# Altium PCB Smart Stepper Fin R1.0.PcbDoc
Units mil, origin at the board's own origin, x right, y up, seen from the top; angles counter-clockwise.
Board outline 2280 x 1255 mil, 2 copper layers (Top Layer, Bottom Layer); 30 components, 42 nets, 186 pads, 90 vias.
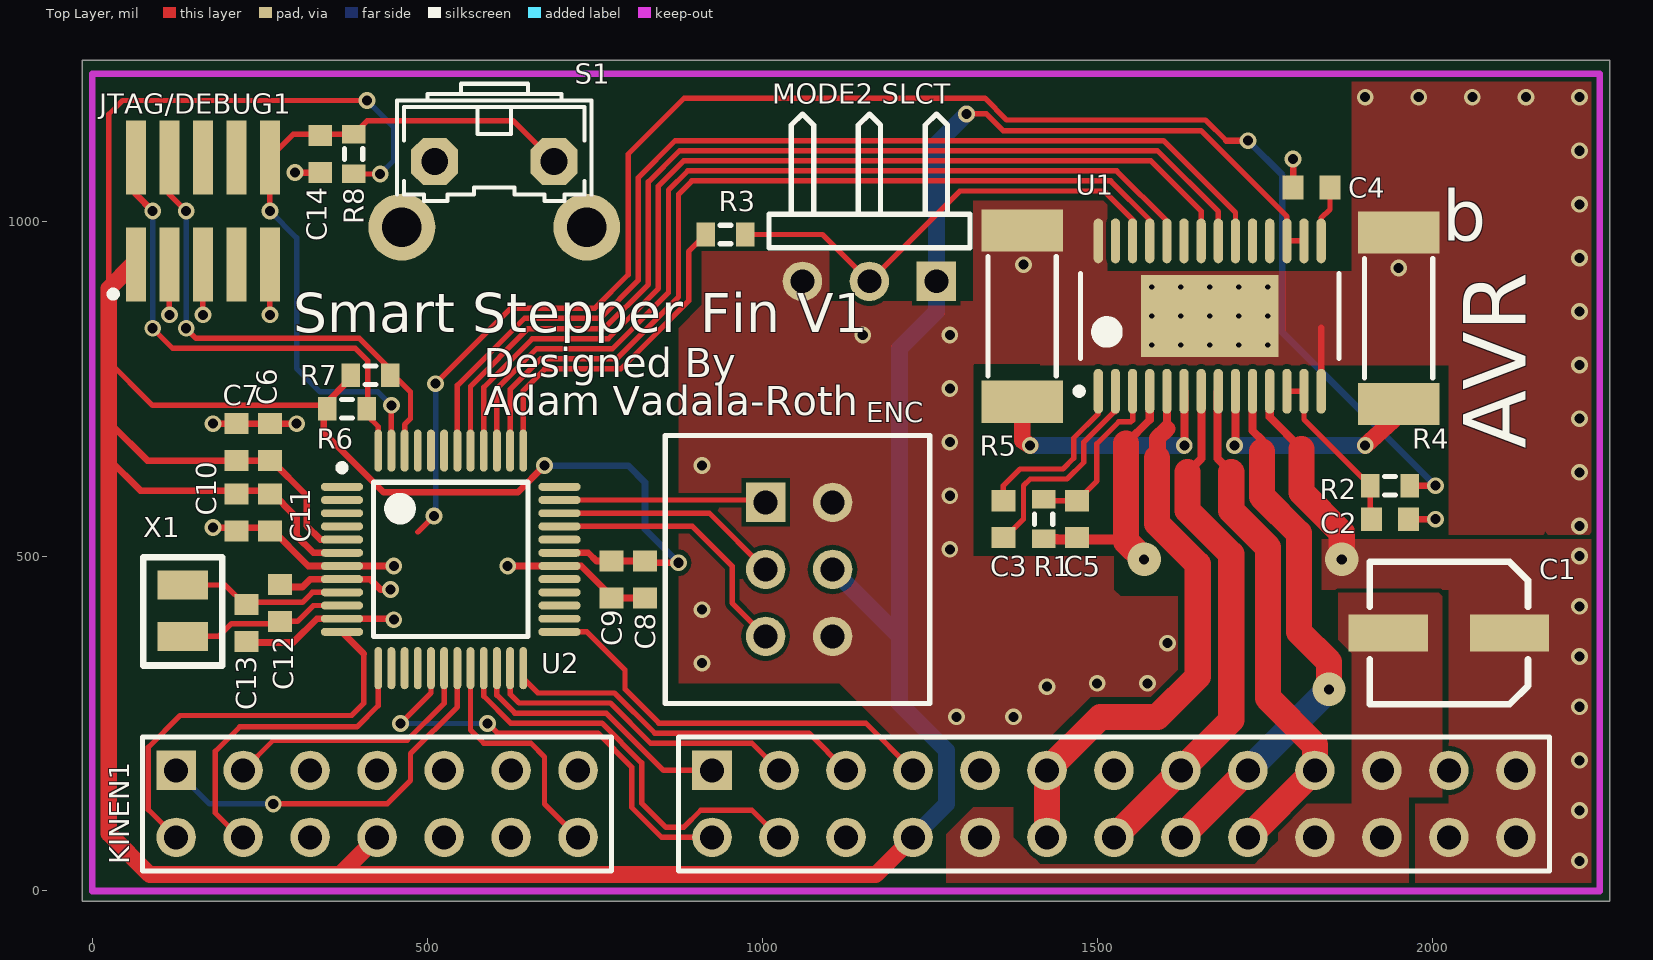
[diagram p0: Top Layer view]
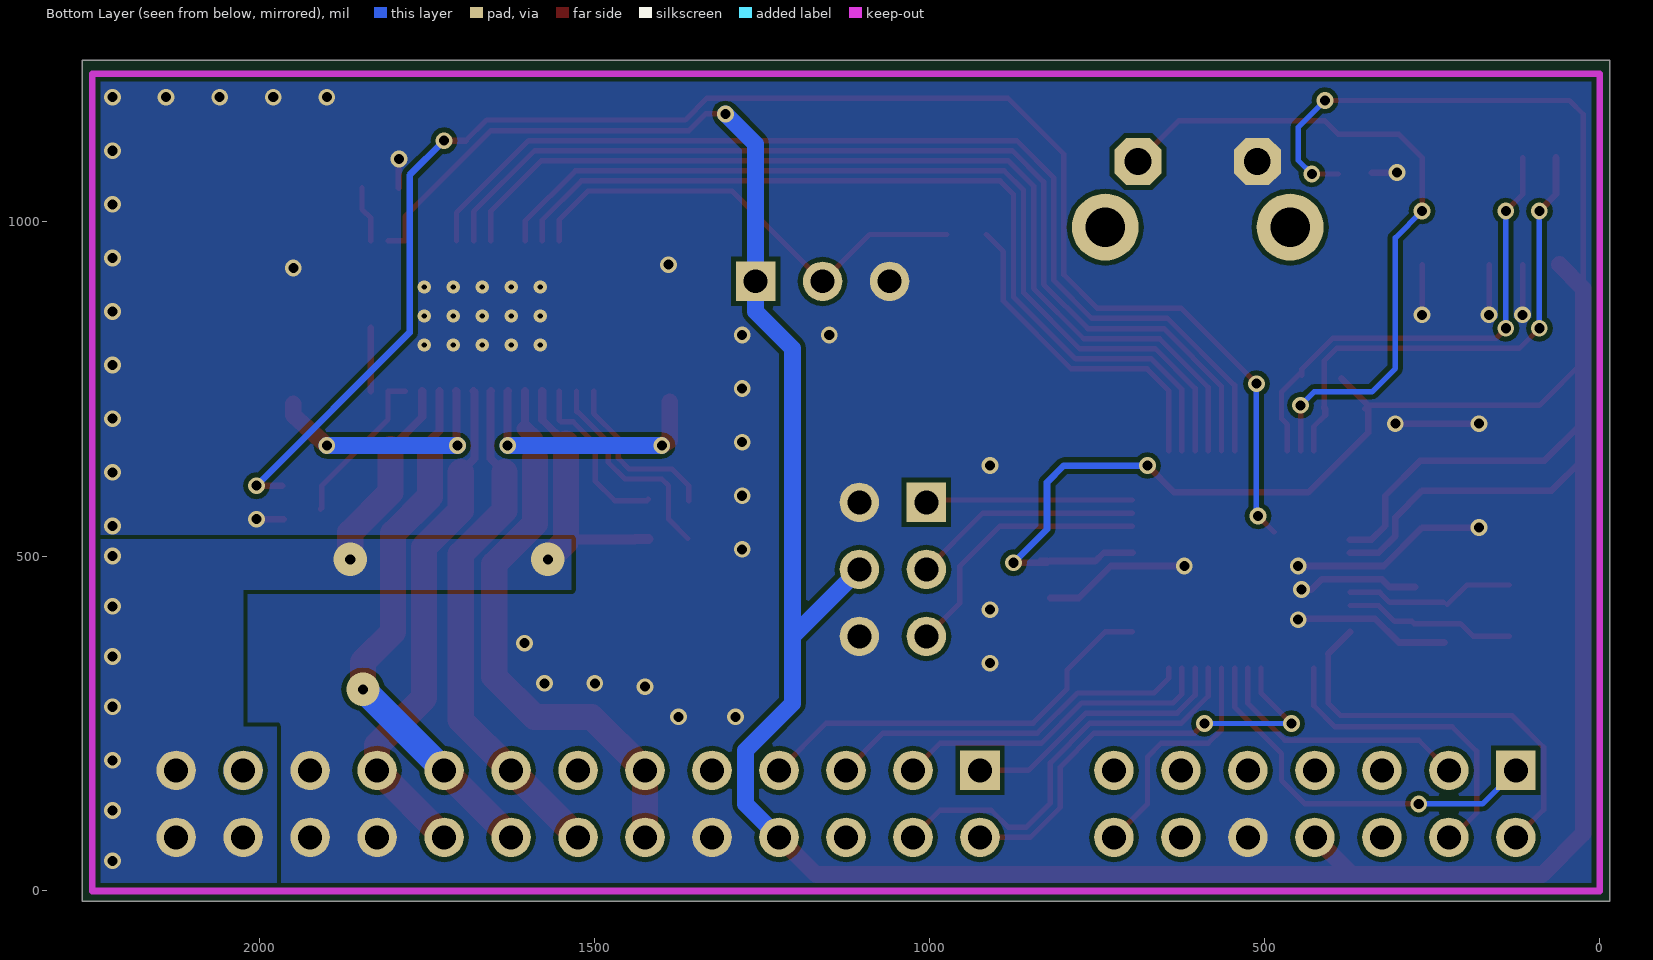
[diagram p1: Bottom Layer view, seen from below]

## Layer stack, top to bottom
Top Solder: solder mask 0.4, Solder Resist, Dk 3.5
Top Layer: signal copper 1.4
Dielectric 1: dielectric 12.6, FR-4, Dk 4.8
Bottom Layer: signal copper 1.4
Bottom Solder: solder mask 0.4, Solder Resist, Dk 3.5

## Board outline
-15,-15 2265,-15 2265,1240 -15,1240

## Design rules (kind name [scope] priority, off if disabled: settings)
Clearance [All] p1: gap=7
PlaneConnect [All] p1: planeconnectstyle=Direct reliefexpansion=20 reliefentries=4 reliefconductorwidth=10 reliefairgap=10
PolygonConnect [All] p1: connectstyle=Direct reliefconductorwidth=10 reliefentries=4 polygonreliefangle="90 Angle" airgapwidth=10
RoutingVias [All] p1: holewidth=15 width=25 viastyle="Through Hole" minholewidth=15 minwidth=25 maxholewidth=28 maxwidth=50
SolderMaskExpansion [All] p1: expansion=4
UnpouredPolygon [All] p1: allowunpoured=FALSE
Width [All] p1: maxlimit=50 minlimit=7 preferedwidth=8
28 further rules are at their usual default settings.

## Classes and differential pairs
component class "U_Smart Stepper Fin - Driver - DRV8825": C1 C2 C3 C4 C5 "MODE2 SLCT" R1 R2 R3 R4 R5 U1
component class "U_Smart Stepper Fin - Kinen Connector": KINEN1
component class "U_Smart Stepper Fin - MCU MKL05Z32VLF4 TQFP48": C6 C7 C8 C9 C10 C11 C12 C13 C14 ENC JTAG/DEBUG1 R6 R7 R8 S1 U2 X1

## Components (designator, comment, footprint, x,y, rotation, side; value= is the part's Value field where it differs from the comment)
C1 "VS C" "Panasonic VS C" 1905,270 r0 top
C2 "0603" 1608[0603] 1937,555 r180 top
C3 "0603" 1608[0603] 1360,555 r270 top
C4 "0603" 1608[0603] 1820,1050 r0 top
C5 "0603" 1608[0603] 1470,555 r90 top
C6 "0603" 1608[0603] 265,670 r270 top
C7 "0603" 1608[0603] 215,670 r270 top
C8 "0603" 1608[0603] 825,465 r90 top
C9 "0603" 1608[0603] 775,465 r90 top
C10 "0603" 1608[0603] 215,565 r270 top
C11 "0603" 1608[0603] 265,565 r270 top
C12 "0603" 1608[0603] 280,430 r90 top
C13 "0603" 1608[0603] 230,400 r270 top
C14 "Cap Semi" 1608[0603] 340,1099.92 r90 top
ENC "Header 3X2" "HDR2X3 Shrouded - Molex 0901301106" 1005,580 r270 top (schematic designator P?)
JTAG/DEBUG1 "ARM Cortex JTAG-DEBUG" FTSH-105-XX-X-DV 165,1015 r180 top
KINEN1 "Kinen Device NEW" "Kinen Port - Device" 725,80 r90 top locked
"MODE2 SLCT" "Header 3H" HDR1X3H 1260,910 r180 top
R1 "0805" J1-0603 1420,555 r90 top
R2 "0603" J1-0603 1937,605 r0 top
R3 "0603" J1-0603 945,980 r180 top
R4 "2512" Resistor2512 1950,855 r270 top
R5 "2512" Resistor2512 1387.98,858.2 r270 top
R6 "0603" J1-0603 380,720 r0 top
R7 "0603" J1-0603 415,770 r0 top
R8 "Res3" J1-0603 390,1099.92 r270 top
S1 "1571610-2" B3F-31XX 600,1040 r180 top
U1 "DRV8825" DRV8825 1667.98,858.2 r90 top
U2 "MKL05Z32VLF4" MKL05Z32VLF4 535,495 r0 top
X1 "ABS07-32.768KHZ-T" ABS07-32.768KHZ-T 135,380 r90 top

## Footprints (in the part's own frame and the unit in brackets; to place one, negate y for a bottom-side part, rotate by r counter-clockwise, add the part's x,y. Pads: shape width x height; smd on the part's side, far side on the other; paste and mask are expansions set on the pad)
1608[0603] [mm] "Chip Capacitor, Body 1.6x0.8mm, IPC High Density"
  rect 0.8x0.9 smd: 1(-0.7,0) 2(0.7,0)
  body extent -0.87,-0.48 0.87,0.48, height 1.3
ABS07-32.768KHZ-T [mm] "ABS07-32.768KHZ-T Crystal Oscillator"
  rect 1.1x1.9 smd: 1(0,0) 2(1.95,0)
  silkscreen extent -1.1,-1.5 3,1.5
B3F-31XX [mil]
  oct 70x70 hole 40: 1(-89,-49) 2(89,-49)
  round 100 hole 59: 3(-138,49) 4(138,49)
  silkscreen extent -145,-165 145,10, body extent -165,-200 165,109, height 303
DRV8825 [mm] "TSOP, 28-Leads, Body 9.70x4.40mm, Pitch 0.65mm, Thermal Pad 5.22.2x3.10.2mm, IPC Medium Density"
  oval 1.7x0.35 smd: 1(-2.85,4.225) 2(-2.85,3.575) 3(-2.85,2.925) 4(-2.85,2.275) 5(-2.85,1.625) 6(-2.85,0.975) 7(-2.85,0.325) 8(-2.85,-0.325) 9(-2.85,-0.975) 10(-2.85,-1.625) 11(-2.85,-2.275) 12(-2.85,-2.925) 13(-2.85,-3.575) 14(-2.85,-4.225) 15(2.85,-4.225) 16(2.85,-3.575) 17(2.85,-2.925) 18(2.85,-2.275) 19(2.85,-1.625) 20(2.85,-0.975) 21(2.85,-0.325) 22(2.85,0.325) 23(2.85,0.975) 24(2.85,1.625) 25(2.85,2.275) 26(2.85,2.925) 27(2.85,3.575) 28(2.85,4.225)
  rect 3.1x5.22 smd: 29(0,0)
  silkscreen extent -2.97,-4.9 1.6,5.07, body extent -2.25,-4.9 2.25,4.9, height 1.2
FTSH-105-XX-X-DV [mm] "1.27mm pitch, 10 pin, terminal strip; vertical, SMT"
  rect 0.75x2.8 smd mask+0: 1(2.54,2.03) 2(2.54,-2.03) 3(1.27,2.03) 4(1.27,-2.03) 5(0,2.03) 6(0,-2.03) 7(-1.27,2.03) 8(-1.27,-2.03) 9(-2.54,2.03) 10(-2.54,-2.03)
  silkscreen extent 3.27,3.03 3.52,3.27
HDR1X3H [mm] "Connector; Header; 3 Position; Right Angle"
  rect 1.5x1.5 hole 0.9: 1(0,0)
  round 1.5 hole 0.9: 2(2.54,0) 3(5.08,0)
  silkscreen extent -1.27,-6.35 6.35,-1.27
"HDR2X3 Shrouded - Molex 0901301106" [mm] "Connector; Header; 3x2 Position Molex 0901301106"
  rect 1.5x1.5 hole 0.9: 1(0,0)
  round 1.5 hole 0.9: 2(0,2.54) 3(2.54,0) 4(2.54,2.54) 5(5.08,0) 6(5.08,2.54)
  silkscreen extent -2.54,-3.81 7.62,6.22, body extent -2.44,-3.65 7.52,6.1, height 8.35
J1-0603 [mm] "Chip Resistor, Body 1.6x0.8mm, IPC High Density"
  rect 0.7x0.9 smd: 1(-0.75,0) 2(0.75,0)
  silkscreen extent -0.2,-0.35 0.2,0.35, body extent -0.85,-0.48 0.85,0.48, height 0.9
"Kinen Port - Device" [mm] "Synthetos Kinen Expansion Port Socket"
  rect 1.5x1.5 hole 0.9: 1(2.54,15.24) 15(2.54,-5.08)
  round 1.5 hole 0.9: 2(0,15.24) 3(2.54,12.7) 4(0,12.7) 5(2.54,10.16) 6(0,10.16) 7(2.54,7.62) 8(0,7.62) 9(2.54,5.08) 10(0,5.08) 11(2.54,2.54) 12(0,2.54) 13(2.54,0) 14(0,0) 16(0,-5.08) 17(2.54,-7.62) 18(0,-7.62) 19(2.54,-10.16) 20(0,-10.16) 21(2.54,-12.7) 22(0,-12.7) 23(2.54,-15.24) 24(0,-15.24) 25(2.54,-17.78) 26(0,-17.78) 27(2.54,-20.32) 28(0,-20.32) 29(2.54,-22.86) 30(0,-22.86) 31(2.54,-25.4) 32(0,-25.4) 33(2.54,-27.94) 34(0,-27.94) 35(2.54,-30.48) 36(0,-30.48) 37(2.54,-33.02) 38(0,-33.02) 39(2.54,-35.56) 40(0,-35.56)
  silkscreen extent -1.27,-36.83 3.81,16.51
MKL05Z32VLF4 [mm] "TSQFP, 48-Leads, Body 7.00x7.00mm, Pitch 0.50mm, IPC Medium Density"
  oval 1.6x0.3 smd: 1(-4.125,2.75) 2(-4.125,2.25) 3(-4.125,1.75) 4(-4.125,1.25) 5(-4.125,0.75) 6(-4.125,0.25) 7(-4.125,-0.25) 8(-4.125,-0.75) 9(-4.125,-1.25) 10(-4.125,-1.75) 11(-4.125,-2.25) 12(-4.125,-2.75) 25(4.125,-2.75) 26(4.125,-2.25) 27(4.125,-1.75) 28(4.125,-1.25) 29(4.125,-0.75) 30(4.125,-0.25) 31(4.125,0.25) 32(4.125,0.75) 33(4.125,1.25) 34(4.125,1.75) 35(4.125,2.25) 36(4.125,2.75)
  oval 0.3x1.6 smd: 13(-2.75,-4.125) 14(-2.25,-4.125) 15(-1.75,-4.125) 16(-1.25,-4.125) 17(-0.75,-4.125) 18(-0.25,-4.125) 19(0.25,-4.125) 20(0.75,-4.125) 21(1.25,-4.125) 22(1.75,-4.125) 23(2.25,-4.125) 24(2.75,-4.125) 37(2.75,4.125) 38(2.25,4.125) 39(1.75,4.125) 40(1.25,4.125) 41(0.75,4.125) 42(0.25,4.125) 43(-0.25,4.125) 44(-0.75,4.125) 45(-1.25,4.125) 46(-1.75,4.125) 47(-2.25,4.125) 48(-2.75,4.125)
  silkscreen extent -4.25,-2.93 2.93,3.6, body extent -3.5,-3.5 3.5,3.5, height 1.6
"Panasonic VS C" [mm]
  rect 3x1.4 smd: 1(5.348,2.921) 2(0.748,2.921)
  silkscreen extent 0.05,0.22 6.05,5.62, body extent 0.1,0.29 6,5.59, height 5.41
Resistor2512 [mm]
  rect 1.6x3.1 smd: 1(-3.25,0) 2(3.25,0)
  silkscreen extent -2.26,-1.3 2.26,1.3, body extent -3.24,-1.4 3.24,1.4, height 0.9

## Part data
C1: library part "Cap Pol1", "Polarized Capacitor (Radial)"
C2 C3 C4 C5 C6 C7 C8 C9 C10 C11 C12 C13: library part "Cap Semi", "Capacitor (Semiconductor SIM Model)"
C14: "Capacitor (Semiconductor SIM Model)"
ENC: "Header, 3-Pin, Dual row"
JTAG/DEBUG1: library part "ARM Cortex JTAG-DEBUG Header"
"MODE2 SLCT": "Header, 3-Pin, Right Angle"
R1 R2 R3 R4 R5 R6 R7: library part Res3, "Resistor"
R8: "Resistor"
S1: library part 1571610-2_1, "SWTCH Momentary Washable"
U1: "DRV8825 Ti Stepper Driver"
U2: "ARM Cortex M0+"
X1: "ABS07-32.768KHZ-T RTC Crystal Oscillator"

## Via types
v1: diameter 25, hole 15, Top Layer to Bottom Layer, 72 vias
v2: diameter 19.68, hole 7.87, Top Layer to Bottom Layer, 15 vias
v3: diameter 50, hole 15, Top Layer to Bottom Layer, 3 vias

## Nets (pads, with @x,y where several pads share a name; then routed paths per layer and width w, separated by ;. In a path a pad name is that pad's centre, name@x,y a point inside that pad or via, vN(x,y) a via of type N, cw(c..) or ccw(c..) an arc to the next point about the centre after c; other vN are vias at no path point)
3.3VCC: "MODE2 SLCT.1" C6.2 C7.2 C8.2 C9.2 C10.1 C11.1 ENC.4 JTAG/DEBUG1.1 KINEN1.8 KINEN1.22 R6.1 R7.1 R8.2 U1.16 U1.17 U2.5 U2.6 U2.31 | length 7145.5
  Top Layer w8: 16,685 24.5,693.5 27.75,696.75 ; 20,795 90,725 345.47,725 R6.1 ; 24.5,899.5 24.5,1159.5 45,1180 v1(410,1180) ; R8.2 v1(429.61,1070.39) ; v1(1305,1160) 1334.5,1160 1359.5,1135 1655,1135 1783.13,1006.87 U1.17 U1.16
  Top Layer w10: 24.5,645 71.94,597.56 265,597.56 305,557.56 305,530 330.16,504.84 U2.6 ; 27.75,696.75 82.06,642.44 267.56,642.44 320,590 320,545 340.47,524.53 U2.5 ; R6.1@345.47,720 345.47,684.53 435,595 635,595 v1(675,635) ; R6.1@345.47,725 R7.1@385.47,765 ; U2.31 740.16,504.84 752.44,492.56 C8.2@820,492.56 ; C8.2@835,492.56 C8.2 825,490 v1(875,490)
  Top Layer w25: JTAG/DEBUG1.1@60.08,935.08 24.5,899.5 24.5,693.5 24.5,645 24.5,85.5 85.5,24.5 369.5,24.5 ; KINEN1.8 369.5,24.5 ; KINEN1.22 1169.5,24.5 369.5,24.5
  Bottom Layer w8: v1(410,1180) 450,1140 450,1090.78 v1(429.61,1070.39)
  Bottom Layer w10: v1(675,635) 800,635 825,610 825,540 v1(875,490)
  Bottom Layer w25: ENC.4 1205,380 ; KINEN1.22 1275,130 1275,210 1205,280 1205,380 ; v1(1305,1160) 1260,1115 1260,910 1260,865 1205,810 1205,380
24VCC: C1.1 C5.1 KINEN1.38 KINEN1.39 KINEN1.40 R1.1 U1.4 U1.11 | length 692.6
  Top Layer w12: 1543,668 1578.41,703.41 U1.4 ; U1.11 1757.54,707.46 1805,660
  Top Layer w15: R1.1 1440,525.47 1440.47,525 1540,525
  Top Layer w39: 1543,668 1543,522 v3(1570,495) ; 1805,660 1805,595 1865,535 v3(1865,495)
  other v1: 2220,45 2220,120 2220,195 2220,275 2220,350 2220,425 2220,500
A: ENC.3 U2.34 | length 342.4
  Top Layer w8: U2.34 921.1,563.9 ENC.3
AOUT1: KINEN1.25 KINEN1.26 U1.5 | length 837.5
  Top Layer w12: 1604,690 U1.5
  Top Layer w25: 1584,651 1590,657 1590,676 1604,690
  Top Layer w39: KINEN1.26 KINEN1.25 1505,260 1590,260 1650,320 1650,487.83 1589,548.83 1589,646
AOUT2: KINEN1.28 KINEN1.29 U1.7 | length 774
  Top Layer w12: 1635,625 1655.5,645.5 1655.5,745.68 U1.7
  Top Layer w39: KINEN1.28 KINEN1.29 1700,255 1700,502.89 1635,567.89 1635,625
B: ENC.5 U2.33 | length 407.8
  Top Layer w8: U2.33 895.79,544.21 955,485 955,430 ENC.5
BOUT1: KINEN1.30 KINEN1.31 U1.10 | length 804.8
  Top Layer w12: U1.10 1731.95,687.05 1746,673 1746,656
  Top Layer w39: KINEN1.30 KINEN1.31 ; 1746,656 1746,588.95 1801,533.95 1801,387 1846,342 v3(1846,301)
  Bottom Layer w39: KINEN1.31 v3(1846,301)
BOUT2: KINEN1.32 KINEN1.33 U1.8 | length 768.2
  Top Layer w12: U1.8 1679.5,744.73 1679.5,645.5 1700,625
  Top Layer w39: 1700,625 1700,567.94 1755,512.94 1755,288 1825,218 KINEN1.33 KINEN1.32
EXTAL0: C13.1 U2.9 X1.2 | length 250.1
  Top Layer w8: X1.2 198.23,456.77 C13.1@227.44,427.56 ; C13.1@233.25,430.81 313.44,430.81 328.41,445.79 U2.9
GND: "MODE2 SLCT.3" C1.2 C2.1 C4.1 C6.1 C7.1 C8.1 C9.1 C10.2 C11.2 C12.2 C13.2 C14.1 ENC.2 ENC.6 JTAG/DEBUG1.3 JTAG/DEBUG1.5 JTAG/DEBUG1.9 KINEN1.10 KINEN1.24 KINEN1.34 KINEN1.35 KINEN1.36 KINEN1.37 R4.1 R5.1 S1.2 U1.14 U1.28 U1.29 U2.7 U2.8 U2.11 U2.30 | length 1496.2
  Top Layer w8: v1(115,860) JTAG/DEBUG1.3 ; v1(165,860) JTAG/DEBUG1.5 ; v1(265,860) JTAG/DEBUG1.9
  Top Layer w10: v1(180,542.44) 265,542.44 322.28,485.16 U2.7 v1@449.84,485.16 ; v1(180,697.56) C7.1 C6.1 v1(305,697.56) ; C13.2@231.65,370.8 299.64,370.8 335.26,406.42 U2.11 v1@448.58,406.42 ; C12.2@275.29,453.66 313.66,453.66 325.47,465.47 U2.8 414.53,465.47 430,450 v1@450,450 ; v1(302.64,1072.36) C14.1 ; v1@620.16,485.16 U2.30 729.84,485.16 777.56,437.44 C8.1@820,437.44 ; C4.1 v1(1792.44,1092.56) ; U1.14 1834.31,840.68 ; C2.1 v1(2005,555)
  other v1: 1290,260 1375,260 1425,305 1500,310 1575,310 910,340 1605,370 450,405 910,420 445,450 450,485 620,485 1280,510 2220,545 1280,590 2220,625 910,635 1280,670 2220,705 1280,750 2220,785 1150,830 1280,830 2220,865 1950,930 1390,935 2220,945 2220,1025 2220,1105 1900,1185 1980,1185 2060,1185 2140,1185 2220,1185
  other v2: 1581.36,814.9 1624.67,814.9 1667.98,814.9 1711.28,814.9 1754.59,814.9 1581.36,858.2 1624.67,858.2 1667.98,858.2 1711.28,858.2 1754.59,858.2 1581.36,901.51 1624.67,901.51 1667.98,901.51 1711.28,901.51 1754.59,901.51
INDEX: ENC.1 U2.35 | length 309.1
  Top Layer w8: U2.35 1001.42,583.58 ENC.1
KSPI_MISO: KINEN1.4 U2.13 | length 485.1
  Top Layer w8: KINEN1.4@230,70 183.47,116.53 183.47,208.47 220,245 395,245 426.73,276.73 U2.13
KSPI_MOSI: KINEN1.2 U2.12 | length 620.5
  Top Layer w8: KINEN1.2 83.47,121.53 83.47,214.5 130.97,262 387,262 405,280 405,354.33
  Top Layer w10: U2.12 405,354.33
NetC2_2: C2.2 R2.1 U1.12 U1.13 | length 243.3
  Top Layer w8: U1.12 U1.13 1808.72,703.75 R2.1 1907.47,571.97 C2.2@1909.44,570
NetC3_1: C3.1 U1.1 | length 259.5
  Top Layer w8: C3.1 1360,605 1385,630 1448.79,630 1465,646.21 1465,676.21 1501.64,712.85 U1.1
NetC3_2: C3.2 U1.2 | length 321.8
  Top Layer w8: C3.2@1361.22,526.22 1390,555 1390,605 1400,615 1455,615 1480,640 1480,670 1525.5,715.5 1527.23,715.5 U1.2
NetC4_2: C4.2 U1.15 | length 85.1
  Top Layer w8: U1.15 1834.31,1004.32 1847.56,1017.56 C4.2
NetC5_2: C5.2 R1.2 U1.3 | length 259.2
  Top Layer w8: R1.2 1421.97,582.56 C5.2 1499.5,612.06 1499.5,667.63 1532.37,700.5 1550.5,700.5 1552.82,702.82 U1.3
NetKINEN1_1: KINEN1.1 U2.19 | length 581.7
  Top Layer w8: v1(270,130) 440,130 475,165 475,205 544.84,274.84 U2.19
  Bottom Layer w8: KINEN1.1 175,130 v1(270,130)
NetKINEN1_3: KINEN1.3 U2.18 | length 394.1
  Top Layer w8: KINEN1.3 270,225 470,225 525.16,280.16 U2.18
NetKINEN1_11: KINEN1.11
NetKINEN1_14: KINEN1.14 U2.20 | length 360.1
  Top Layer w8: U2.20 564.53,240.47 584.47,220.53 654.47,220.53 675,200 675,130 KINEN1.14
NetKINEN1_15: KINEN1.15 U2.22 | length 407.9
  Top Layer w8: U2.22 603.9,292.32 630.69,265.53 767.05,265.53 852.57,180 KINEN1.15
NetKINEN1_16: KINEN1.16 U2.17 | length 672.1
  Top Layer w8: v1(460,250) 505.47,295.47 U2.17 ; v1(590,250) 604.47,235.53 754.62,235.53 805,185.15 805,125 850,80 KINEN1.16
  Bottom Layer w8: v1(460,250) v1(590,250)
NetKINEN1_17: KINEN1.17 U2.23 | length 487.3
  Top Layer w8: U2.23 623.58,293.84 636.9,280.53 773.26,280.53 833.26,220.53 984.47,220.53 KINEN1.17
NetKINEN1_18: KINEN1.18 U2.21 | length 626.3
  Top Layer w8: U2.21 584.21,290.79 624.47,250.53 760.83,250.53 820,191.36 820,131.21 856.21,95 882.69,95 908.21,120.53 984.47,120.53 KINEN1.18
NetKINEN1_19: KINEN1.19 U2.24 | length 553.9
  Top Layer w8: U2.24 643.27,317.26 665,295.53 779.47,295.53 839.47,235.53 1069.47,235.53 KINEN1.19
NetKINEN1_21: KINEN1.21 U2.25 | length 630.1
  Top Layer w8: U2.25 738.27,386.73 795,330 795,301.21 845.69,250.53 1154.47,250.53 KINEN1.21
"NetMODE2 SLCT_2": "MODE2 SLCT.2" R3.1 U1.26 | length 712.7
  Top Layer w8: R3.1 1090,980 1160,910 1295,1045 1510,1045 1552.82,1002.18 U1.26
NetR2_2: R2.2 | length 2419.4
  Top Layer w8: 485.79,535.79 v1(509.84,559.84) v1@510,560 ; v1@512.5,757.5 625,870 750,870 800,920 800,1100 883.5,1183.5 1332.21,1183.5 1364.71,1151 1661.63,1151 1692.63,1120
  Top Layer w10: 1692.63,1120 v1(1725,1120) ; R2.2 v1(2005,605)
  Bottom Layer w8: v1@512.34,562.34 v1(512.34,757.34)
  Bottom Layer w10: v1(1725,1120) 1776.43,1068.57 1776.43,833.57 v1(2005,605)
NetR3_2: R3.2 U2.37 | length 501.7
  Top Layer w8: U2.37 643.27,747.2 675.46,779.39 788.73,779.39 890,880.67 890,954.53 R3.2
NetR4_2: R4.2 U1.9 | length 365.6
  Top Layer w12: v1@1706.77,660 1706.45,660.32 1706.45,745.68 U1.9@1706.77,746
  Top Layer w25: v1(1900,665) 1950,710 R4.2
  Bottom Layer w25: v1(1705,665) v1(1900,665)
NetR5_2: R5.2 U1.6 | length 383.3
  Top Layer w12: U1.6 1630,745.59 v1(1630,665)
  Top Layer w25: R5.2 1387.98,672.02 v1(1400,665)
  Bottom Layer w25: v1(1400,665) v1(1630,665)
NetU1_20: U1.20 U2.42 | length 1586.6
  Top Layer w8: U2.42 544.84,754.84 645,855 758.27,855 815,911.73 815,1064.85 870.15,1120 1599.04,1120 1706.36,1012.68 U1.20
NetU1_21: U1.21 U2.41 | length 1528.9
  Top Layer w8: U2.41 564.53,753.31 650.61,839.39 763.87,839.39 830,905.52 830,1058.64 876.36,1105 1590,1105 1680.77,1014.23 U1.21
NetU1_22: U1.22 U2.40 | length 1470.7
  Top Layer w8: U2.40 584.21,751.79 656.82,824.39 770.09,824.39 845,899.31 845,1052.43 882.57,1090 1580,1090 1655.18,1014.82 U1.22
NetU1_24: U1.24 U2.39 | length 1377.8
  Top Layer w8: U2.39 603.9,750.26 663.03,809.39 776.3,809.39 860,893.09 860,1046.21 888.79,1075 1529.04,1075 1604,1000.04 U1.24
NetU1_25: U1.25 U2.38 | length 1320.2
  Top Layer w8: U2.38 623.58,748.73 669.25,794.39 782.51,794.39 875,886.88 875,1040 895,1060 1520,1060 1578.41,1001.59 U1.25
RESET: C14.2 JTAG/DEBUG1.10 R8.1 S1.1 U2.47 | length 1035.4
  Top Layer w8: v1(265,1015) JTAG/DEBUG1.10 299.53,1129.45 R8.1 410.55,1150 628,1150 S1.1 ; U2.47 v1(446.42,725)
  Bottom Layer w8: v1(265,1015) 305,975 305,780 340,745 426.42,745 v1(446.42,725)
TCK/SWDCLK: JTAG/DEBUG1.4 R7.2 U2.46 | length 734.7
  Top Layer w8: JTAG/DEBUG1.4 115,1040 v1(140,1015) ; v1(140,840) 155,825 398.74,825 444.53,779.21 R7.2 ; R7.2@447.26,772.74 475,745 475,705 466.1,696.1 U2.46
  Bottom Layer w8: v1(140,840) v1(140,1015)
TMS/SWDIO: JTAG/DEBUG1.2 R6.2 U2.48 | length 748.4
  Top Layer w8: v1(90,840) 120,810 392.53,810 411.25,791.27 R6.2@411.25,721.72 ; R6.2@409.53,710.47 426.73,693.27 U2.48
  Top Layer w10: JTAG/DEBUG1.2 65,1040 v1(90,1015) ; R6.2@409.53,710.47 R6.2 R6.2@411.25,721.72
  Bottom Layer w8: v1(90,840) v1(90,1015)
XTAL0: C12.1 U2.10 X1.1 | length 252.1
  Top Layer w8: X1.1 188.54,380 207.73,399.19 C12.1@276.75,399.19 ; C12.1 306.28,402.44 329.94,426.1 U2.10
pads on no net: JTAG/DEBUG1.6 JTAG/DEBUG1.7 JTAG/DEBUG1.8 KINEN1.5 KINEN1.6 KINEN1.7 KINEN1.9 KINEN1.12 KINEN1.13 KINEN1.20 KINEN1.23 KINEN1.27 S1.3 S1.4 U1.18 U1.19 U1.23 U1.27 U2.1 U2.2 U2.3 U2.4 U2.14 U2.15 U2.16 U2.26 U2.27 U2.28 U2.29 U2.32 U2.36 U2.43 U2.44 U2.45

## Polygon pours and split planes (outlines as drawn)
GND on Top Layer "Top Layer-No Net" (solid, remove dead copper, pour order 11): 1315,895 1415,895 1415,786.74 1316.74,786.74 1315,785 1315,580 1315,500 1525,500 1525,450 1535,440 1620,440 1620,330 1580,290 1490,290 1430,230 1210,230 1195,230 1115,310 875,310 875,840 910,875 910,940 910,955 1075,955 1100,955 1100,880 1315,880
24VCC on Top Layer "Top Layer-No Net" (solid, remove dead copper, pour order 5): 1975,-15 2265,-15 2265,525 1905,525 1835,525 1835,495 1835,450 1905,450 2025,450 2025,445 2025,250 2025,235 2025.57,224.5 2025,225 2025,220 2025,190 2025,135 2025,130 2075,130 1975,130
GND on Top Layer "Top Layer-No Net" (solid, remove dead copper, pour order 4): 1860,445 1860,375 1880,355 1880,130 1780,130 1770,120 1770,75 1735,40 1665,40 1415,40 1375,80 1375,125 1315,125 1275,85 1275,35 1275,-15 1770,-15 1965,-15 1965,140 2014.75,140 2015,145 2015,195 2015,230 2015.97,230.19 2015,240 2015,445
GND on Top Layer "Top Layer-No Net" (solid, remove dead copper, pour order 6): 1315,1030 1315,895 1415,895 1415,785 2025,785 2025,730 2025,680 2025,540 2025,530 2085,530 2145,530 2169.14,530 2169.14,540 2169.14,530 2217,530 2265,530 2265,540 2270,680 2265,685 2265,1020 2265,1240 2070,1240 1880,1240 1880,1020 1880,925 1515,925 1515,1030
GND on Bottom Layer "Top Layer-No Net" (solid, remove dead copper, pour order 9): -15,-15 -15,1240 2265,1240 2265,-15
24VCC on Bottom Layer "Top Layer-No Net" (solid, remove dead copper, pour order 7): 1975,-15 2265,-15 2265,525 1535,525 1535,465 1820,465 1535,465 1535,450 1835,450 1880,450 2025,450 2025,245 1975,245

## Keep-outs
Keep-Out Layer:
  lines w10: 0,0 0,1220 2250,1220 2250,0 0,0

## Silkscreen, mask and mechanical layers (free items; w line width, h text height)
Top Overlay:
  text "b" at 2015,945 h130
  text "Smart Stepper Fin V1" at 300,815 h100
  text "Designed By" at 584.21,751.79 h75
  text "Adam Vadala-Roth" at 584.21,695 h75
  text "AVR" at 2170,660 h160 r90
Mechanical 15:
  the board outline again, w10